# Altium PCB Swarm-Medusa-Antenna.PcbDoc
Units mil, origin at the board's own origin, x right, y up, seen from the top; angles counter-clockwise.
Board outline 3500 x 3500 mil, 2 copper layers (Top Layer, Bottom Layer); 8 components, 6 nets, 16 pads, 1358 vias.
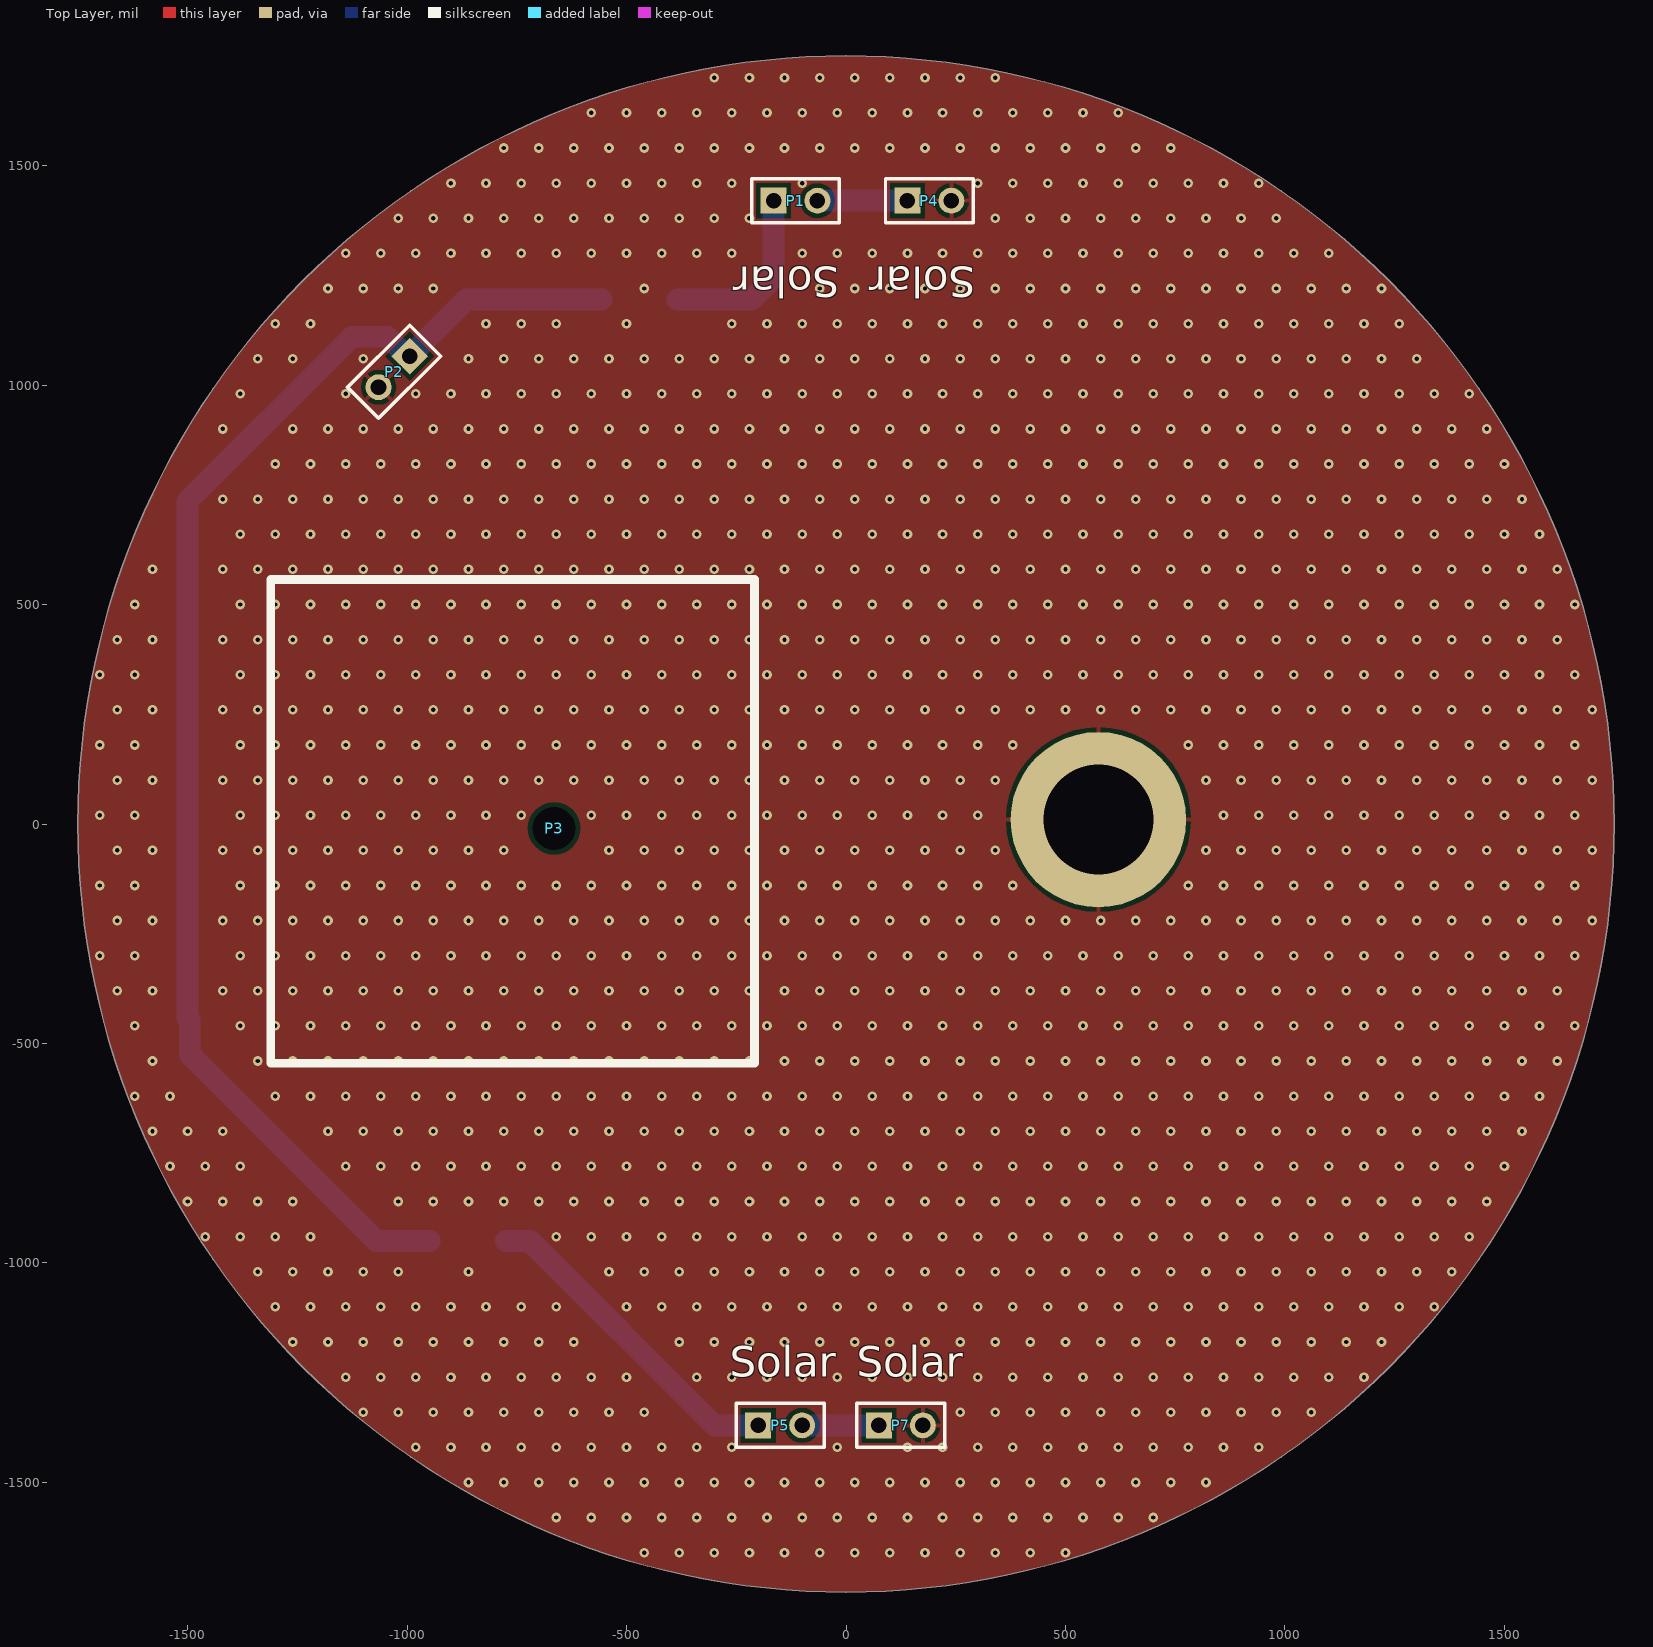
[diagram p0: Top Layer view]
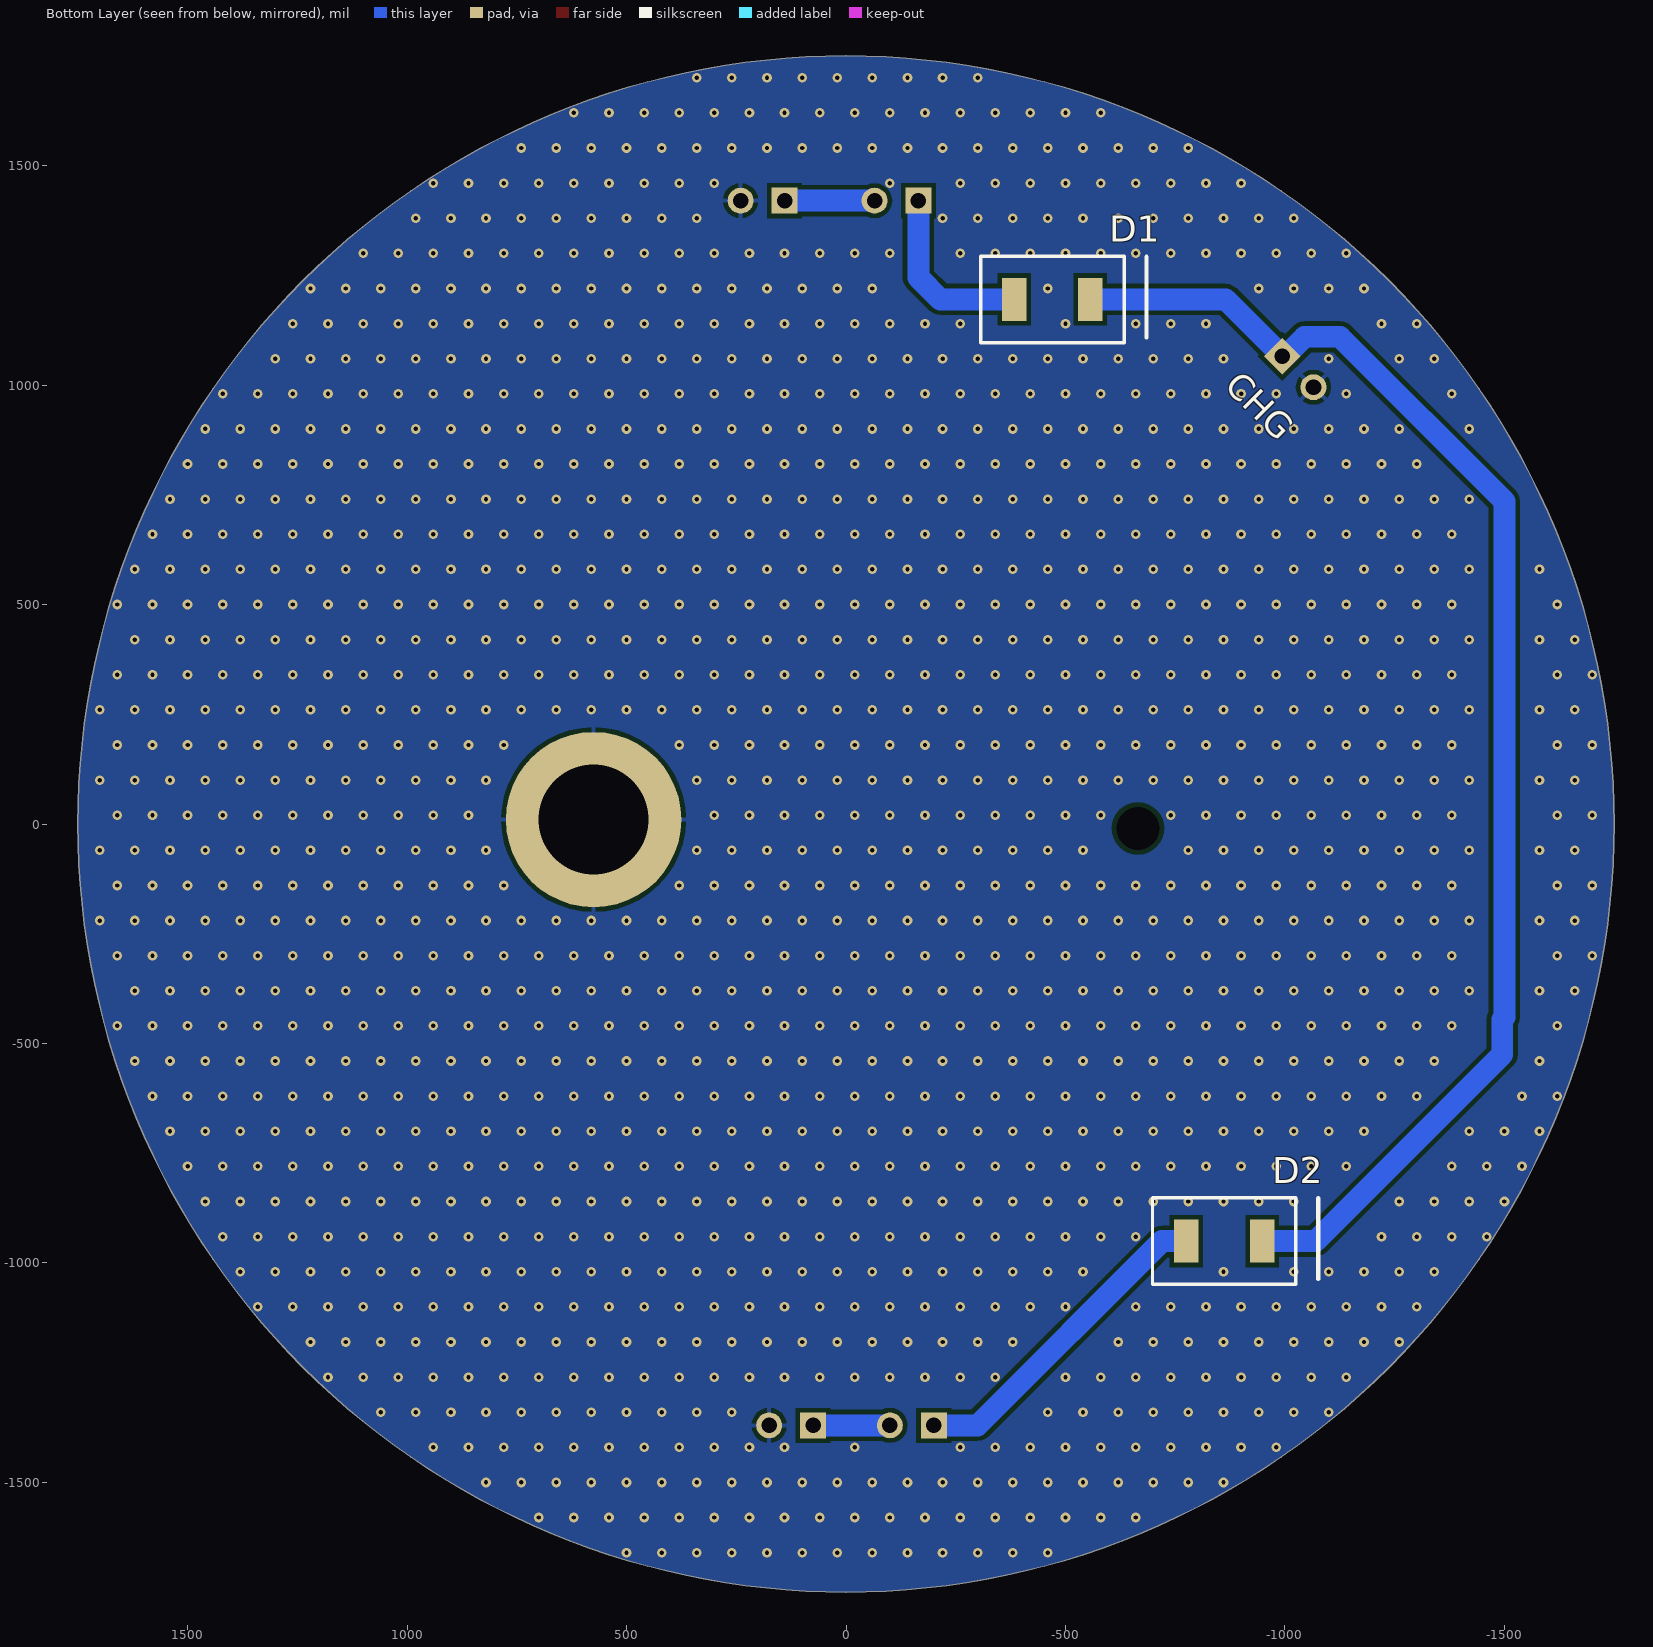
[diagram p1: Bottom Layer view, seen from below]

## Layer stack, top to bottom
Top Solder: solder mask 0.4, Solder Resist, Dk 3.5
Top Layer: signal copper 1.4
Dielectric 1: dielectric 12.6, FR-4, Dk 4.8
Bottom Layer: signal copper 1.4
Bottom Solder: solder mask 0.4, Solder Resist, Dk 3.5

## Board outline
-1750,0 ccw(c0,0) 0,-1750 ccw(c0,0) 1750,0 ccw(c0,0) 0,1750 ccw(c0,0)

## Design rules (kind name [scope] priority, off if disabled: settings)
Clearance [All] p1: gap=10 ignorepadtopadclearanceinfootprint=FALSE except(0: Arc-Hole Track-Hole SMDPad-Hole THPad-Hole Via-Hole Fill-Hole Poly-Hole Region-Hole Text-Hole)
PolygonConnect [All] p1: connectstyle=Relief reliefconductorwidth=10 reliefentries=4 polygonreliefangle="90 Angle" airgapwidth=10
RoutingVias [All] p1: holewidth=28 width=50 viastyle="Through Hole" minholewidth=28 minwidth=50 maxholewidth=28 maxwidth=50
SolderMaskExpansion [All] p1: expansion=4 istentingtop=FALSE
Width [All] p1: maxlimit=50 minlimit=10 preferedwidth=20
30 further rules are at their usual default settings.

## Components (designator, comment, footprint, x,y, rotation, side; value= is the part's Value field where it differs from the comment)
D1 "PMEG3050EP*" Diode_PMEG3050EP -470,1195 r180 bottom
D2 "PMEG3050EP*" Diode_PMEG3050EP -861.61,-950 r180 bottom
P1 "Solar" HDR1X2 -165,1420 r0 top
P2 "Output" HDR1X2 -994.29,1065.71 r225 top
P3 "GPS" "Iridium Antenna" -208.31,-545.43 r180 top
P4 "Solar" HDR1X2 140,1420 r0 top
P5 "Solar" HDR1X2 -200,-1370 r0 top
P7 "Solar" HDR1X2 75,-1370 r0 top

## Footprints (in the part's own frame and the unit in brackets; to place one, negate y for a bottom-side part, rotate by r counter-clockwise, add the part's x,y. Pads: shape width x height; smd on the part's side, far side on the other; paste and mask are expansions set on the pad)
Diode_PMEG3050EP [mm]
  rect 1.4x2.5 smd: A(-2.2,0) K(2.2,0)
  silkscreen extent -4.15,-2.5 5.45,2.5
HDR1X2 [mm] "Connector; Header; 2 Position"
  rect 1.5x1.5 hole 0.9: 1(0,0)
  round 1.5 hole 0.9: 2(2.54,0)
  silkscreen extent -1.27,-1.27 3.81,1.27
"Iridium Antenna" [mm] "Iridium patch antenna"
  round 1.524 hole 2.5: 0(11.6,-13.6)
  silkscreen extent 0,-28 28,0

## Part data
D1 D2: library part Diode_PMEG3050EP
P1 P2 P4 P5 P7: library part "Header 2", "Header, 2-Pin", LatestRevisionDate=17-Jul-2002, LatestRevisionNote="Re-released for DXP Platform.", Publisher="Altium Limited"
P3: library part "Iridium Antenna"

## Free pads (board coordinates)
  round 400 hole 250: 1(575,10)

## Via types
v1: diameter 22, hole 10, Top Layer to Bottom Layer, 1358 vias

## Nets (pads, with @x,y where several pads share a name; then routed paths per layer and width w, separated by ;. In a path a pad name is that pad's centre, name@x,y a point inside that pad or via, vN(x,y) a via of type N, cw(c..) or ccw(c..) an arc to the next point about the centre after c; other vN are vias at no path point)
GND: P2.2 P4.2 P7.2 pad.1
  other v1: -460,-1660 -380,-1660 -300,-1660 -220,-1660 -140,-1660 -60,-1660 20,-1660 100,-1660 180,-1660 260,-1660 340,-1660 420,-1660 500,-1660 -660,-1580 -580,-1580 -500,-1580 -420,-1580 -340,-1580 -260,-1580 -180,-1580 -100,-1580 -20,-1580 60,-1580 140,-1580 220,-1580 300,-1580 380,-1580 460,-1580 540,-1580 620,-1580 700,-1580 -860,-1500 -780,-1500 -700,-1500 -620,-1500 -540,-1500 -460,-1500 -380,-1500 -300,-1500 -220,-1500 -140,-1500 -60,-1500 20,-1500 100,-1500 180,-1500 260,-1500 340,-1500 420,-1500 500,-1500 580,-1500 660,-1500 740,-1500 820,-1500 -980,-1420 -900,-1420 -820,-1420 -740,-1420 -660,-1420 -580,-1420 -500,-1420 -420,-1420 -340,-1420 -260,-1420 -20,-1420 140,-1420 220,-1420 300,-1420 380,-1420 460,-1420 540,-1420 620,-1420 700,-1420 780,-1420 860,-1420 940,-1420 -1100,-1340 -1020,-1340 -940,-1340 -860,-1340 -780,-1340 -700,-1340 -620,-1340 -540,-1340 -460,-1340 260,-1340 340,-1340 420,-1340 500,-1340 580,-1340 660,-1340 740,-1340 820,-1340 900,-1340 980,-1340 1060,-1340 -1140,-1260 -1060,-1260 -980,-1260 -900,-1260 -820,-1260 -740,-1260 -660,-1260 -580,-1260 -500,-1260 -340,-1260 -260,-1260 -180,-1260 -100,-1260 -20,-1260 60,-1260 140,-1260 220,-1260 300,-1260 380,-1260 460,-1260 540,-1260 620,-1260 700,-1260 780,-1260 860,-1260 940,-1260 1020,-1260 1100,-1260 1180,-1260 -1260,-1180 -1180,-1180 -1100,-1180 -1020,-1180 -940,-1180 -860,-1180 -780,-1180 -700,-1180 -620,-1180 -380,-1180 -300,-1180 -220,-1180 -140,-1180 -60,-1180 20,-1180 100,-1180 180,-1180 260,-1180 340,-1180 420,-1180 500,-1180 580,-1180 660,-1180 740,-1180 820,-1180 900,-1180 980,-1180 1060,-1180 1140,-1180 1220,-1180 -1300,-1100 -1220,-1100 -1140,-1100 -1060,-1100 -980,-1100 -900,-1100 -820,-1100 -740,-1100 -660,-1100 -500,-1100 -420,-1100 -340,-1100 -260,-1100 -180,-1100 -100,-1100 -20,-1100 60,-1100 140,-1100 220,-1100 300,-1100 380,-1100 460,-1100 540,-1100 620,-1100 700,-1100 780,-1100 860,-1100 940,-1100 1020,-1100 1100,-1100 1180,-1100 1260,-1100 1340,-1100 -1340,-1020 -1260,-1020 -1180,-1020 -1100,-1020 -1020,-1020 -860,-1020 -540,-1020 -460,-1020 -380,-1020 -300,-1020 -220,-1020 -140,-1020 -60,-1020 20,-1020 100,-1020 180,-1020 260,-1020 340,-1020 420,-1020 500,-1020 580,-1020 660,-1020 740,-1020 820,-1020 900,-1020 980,-1020 1060,-1020 1140,-1020 1220,-1020 1300,-1020 1380,-1020 -1460,-940 -1380,-940 -1300,-940 -1220,-940 -660,-940 -580,-940 -500,-940 -420,-940 -340,-940 -260,-940 -180,-940 -100,-940 -20,-940 60,-940 140,-940 220,-940 300,-940 380,-940 460,-940 540,-940 620,-940 700,-940 780,-940 860,-940 940,-940 1020,-940 1100,-940 1180,-940 1260,-940 1340,-940 1420,-940 -1500,-860 -1420,-860 -1340,-860 -1260,-860 -1020,-860 -940,-860 -860,-860 -780,-860 -700,-860 -620,-860 -540,-860 -460,-860 -380,-860 -300,-860 -220,-860 -140,-860 -60,-860 20,-860 100,-860 180,-860 260,-860 340,-860 420,-860 500,-860 580,-860 660,-860 740,-860 820,-860 900,-860 980,-860 1060,-860 1140,-860 1220,-860 1300,-860 1380,-860 1460,-860 -1540,-780 -1460,-780 -1380,-780 -1140,-780 -1060,-780 -980,-780 -900,-780 -820,-780 -740,-780 -660,-780 -580,-780 -500,-780 -420,-780 -340,-780 -260,-780 -180,-780 -100,-780 -20,-780 60,-780 140,-780 220,-780 300,-780 380,-780 460,-780 540,-780 620,-780 700,-780 780,-780 860,-780 940,-780 1020,-780 1100,-780 1180,-780 1260,-780 1340,-780 1420,-780 1500,-780 -1580,-700 -1500,-700 -1420,-700 -1180,-700 -1100,-700 -1020,-700 -940,-700 -860,-700 -780,-700 -700,-700 -620,-700 -540,-700 -460,-700 -380,-700 -300,-700 -220,-700 -140,-700 -60,-700 20,-700 100,-700 180,-700 260,-700 340,-700 420,-700 500,-700 580,-700 660,-700 740,-700 820,-700 900,-700 980,-700 1060,-700 1140,-700 1220,-700 1300,-700 1380,-700 1460,-700 1540,-700 -1620,-620 -1540,-620 -1300,-620 -1220,-620 -1140,-620 -1060,-620 -980,-620 -900,-620 -820,-620 -740,-620 -660,-620 -580,-620 -500,-620 -420,-620 -340,-620 -260,-620 -180,-620 -100,-620 -20,-620 60,-620 140,-620 220,-620 300,-620 380,-620 460,-620 540,-620 620,-620 700,-620 780,-620 860,-620 940,-620 1020,-620 1100,-620 1180,-620 1260,-620 1340,-620 1420,-620 1500,-620 1580,-620 -1580,-540 -1340,-540 -1260,-540 -1180,-540 -1100,-540 -1020,-540 -940,-540 -860,-540 -780,-540 -700,-540 -620,-540 -540,-540 -460,-540 -380,-540 -300,-540 -220,-540 -140,-540 -60,-540 20,-540 100,-540 180,-540 260,-540 340,-540 420,-540 500,-540 580,-540 660,-540 740,-540 820,-540 900,-540 980,-540 1060,-540 1140,-540 1220,-540 1300,-540 1380,-540 1460,-540 1540,-540 1620,-540 -1620,-460 -1380,-460 -1300,-460 -1220,-460 -1140,-460 -1060,-460 -980,-460 -900,-460 -820,-460 -740,-460 -660,-460 -580,-460 -500,-460 -420,-460 -340,-460 -260,-460 -180,-460 -100,-460 -20,-460 60,-460 140,-460 220,-460 300,-460 380,-460 460,-460 540,-460 620,-460 700,-460 780,-460 860,-460 940,-460 1020,-460 1100,-460 1180,-460 1260,-460 1340,-460 1420,-460 1500,-460 1580,-460 1660,-460 -1660,-380 -1580,-380 -1420,-380 -1340,-380 -1260,-380 -1180,-380 -1100,-380 -1020,-380 -940,-380 -860,-380 -780,-380 -700,-380 -620,-380 -540,-380 -460,-380 -380,-380 -300,-380 -220,-380 -140,-380 -60,-380 20,-380 100,-380 180,-380 260,-380 340,-380 420,-380 500,-380 580,-380 660,-380 740,-380 820,-380 900,-380 980,-380 1060,-380 1140,-380 1220,-380 1300,-380 1380,-380 1460,-380 1540,-380 1620,-380 -1700,-300 -1620,-300 -1380,-300 -1300,-300 -1220,-300 -1140,-300 -1060,-300 -980,-300 -900,-300 -820,-300 -740,-300 -660,-300 -580,-300 -500,-300 -420,-300 -340,-300 -260,-300 -180,-300 -100,-300 -20,-300 60,-300 140,-300 220,-300 300,-300 380,-300 460,-300 540,-300 620,-300 700,-300 780,-300 860,-300 940,-300 1020,-300 1100,-300 1180,-300 1260,-300 1340,-300 1420,-300 1500,-300 1580,-300 1660,-300 -1660,-220 -1580,-220 -1420,-220 -1340,-220 -1260,-220 -1180,-220 -1100,-220 -1020,-220 -940,-220 -860,-220 -780,-220 -700,-220 -620,-220 -540,-220 -460,-220 -380,-220 -300,-220 -220,-220 -140,-220 -60,-220 20,-220 100,-220 180,-220 260,-220 340,-220 420,-220 500,-220 580,-220 660,-220 740,-220 820,-220 900,-220 980,-220 1060,-220 1140,-220 1220,-220 1300,-220 1380,-220 1460,-220 1540,-220 1620,-220 1700,-220 -1700,-140 -1620,-140 -1380,-140 -1300,-140 -1220,-140 -1140,-140 -1060,-140 -980,-140 -900,-140 -820,-140 -740,-140 -660,-140 -580,-140 -500,-140 -420,-140 -340,-140 -260,-140 -180,-140 -100,-140 -20,-140 60,-140 140,-140 220,-140 300,-140 380,-140 780,-140 860,-140 940,-140 1020,-140 1100,-140 1180,-140 1260,-140 1340,-140 1420,-140 1500,-140 1580,-140 1660,-140 -1660,-60 -1580,-60 -1420,-60 -1340,-60 -1260,-60 -1180,-60 -1100,-60 -1020,-60 -940,-60 -860,-60 -780,-60 -540,-60 -460,-60 -380,-60 -300,-60 -220,-60 -140,-60 -60,-60 20,-60 100,-60 180,-60 260,-60 340,-60 820,-60 900,-60 980,-60 1060,-60 1140,-60 1220,-60 1300,-60 1380,-60 1460,-60 1540,-60 1620,-60 1700,-60 -1700,20 -1620,20 -1380,20 -1300,20 -1220,20 -1140,20 -1060,20 -980,20 -900,20 -820,20 -740,20 -580,20 -500,20 -420,20 -340,20 -260,20 -180,20 -100,20 -20,20 60,20 140,20 220,20 300,20 860,20 940,20 1020,20 1100,20 1180,20 1260,20 1340,20 1420,20 1500,20 1580,20 1660,20 -1660,100 -1580,100 -1420,100 -1340,100 -1260,100 -1180,100 -1100,100 -1020,100 -940,100 -860,100 -780,100 -700,100 -620,100 -540,100 -460,100 -380,100 -300,100 -220,100 -140,100 -60,100 20,100 100,100 180,100 260,100 340,100 820,100 900,100 980,100 1060,100 1140,100 1220,100 1300,100 1380,100 1460,100 1540,100 1620,100 1700,100 -1700,180 -1620,180 -1380,180 -1300,180 -1220,180 -1140,180 -1060,180 -980,180 -900,180 -820,180 -740,180 -660,180 -580,180 -500,180 -420,180 -340,180 -260,180 -180,180 -100,180 -20,180 60,180 140,180 220,180 300,180 380,180 780,180 860,180 940,180 1020,180 1100,180 1180,180 1260,180 1340,180 1420,180 1500,180 1580,180 1660,180 -1660,260 -1580,260 -1420,260 -1340,260 -1260,260 -1180,260 -1100,260 -1020,260 -940,260 -860,260 -780,260 -700,260 -620,260 -540,260 -460,260 -380,260 -300,260 -220,260 -140,260 -60,260 20,260 100,260 180,260 260,260 340,260 420,260 500,260 580,260 660,260 740,260 820,260 900,260 980,260 1060,260 1140,260 1220,260 1300,260 1380,260 1460,260 1540,260 1620,260 1700,260 -1700,340 -1620,340 -1380,340 -1300,340 -1220,340 -1140,340 -1060,340 -980,340 -900,340 -820,340 -740,340 -660,340 -580,340 -500,340 -420,340 -340,340 -260,340 -180,340 -100,340 -20,340 60,340 140,340 220,340 300,340 380,340 460,340 540,340 620,340 700,340 780,340 860,340 940,340 1020,340 1100,340 1180,340 1260,340 1340,340 1420,340 1500,340 1580,340 1660,340 -1660,420 -1580,420 -1420,420 -1340,420 -1260,420 -1180,420 -1100,420 -1020,420 -940,420 -860,420 -780,420 -700,420 -620,420 -540,420 -460,420 -380,420 -300,420 -220,420 -140,420 -60,420 20,420 100,420 180,420 260,420 340,420 420,420 500,420 580,420 660,420 740,420 820,420 900,420 980,420 1060,420 1140,420 1220,420 1300,420 1380,420 1460,420 1540,420 1620,420 -1620,500 -1380,500 -1300,500 -1220,500 -1140,500 -1060,500 -980,500 -900,500 -820,500 -740,500 -660,500 -580,500 -500,500 -420,500 -340,500 -260,500 -180,500 -100,500 -20,500 60,500 140,500 220,500 300,500 380,500 460,500 540,500 620,500 700,500 780,500 860,500 940,500 1020,500 1100,500 1180,500 1260,500 1340,500 1420,500 1500,500 1580,500 1660,500 -1580,580 -1420,580 -1340,580 -1260,580 -1180,580 -1100,580 -1020,580 -940,580 -860,580 -780,580 -700,580 -620,580 -540,580 -460,580 -380,580 -300,580 -220,580 -140,580 -60,580 20,580 100,580 180,580 260,580 340,580 420,580 500,580 580,580 660,580 740,580 820,580 900,580 980,580 1060,580 1140,580 1220,580 1300,580 1380,580 1460,580 1540,580 1620,580 -1380,660 -1300,660 -1220,660 -1140,660 -1060,660 -980,660 -900,660 -820,660 -740,660 -660,660 -580,660 -500,660 -420,660 -340,660 -260,660 -180,660 -100,660 -20,660 60,660 140,660 220,660 300,660 380,660 460,660 540,660 620,660 700,660 780,660 860,660 940,660 1020,660 1100,660 1180,660 1260,660 1340,660 1420,660 1500,660 1580,660 -1420,740 -1340,740 -1260,740 -1180,740 -1100,740 -1020,740 -940,740 -860,740 -780,740 -700,740 -620,740 -540,740 -460,740 -380,740 -300,740 -220,740 -140,740 -60,740 20,740 100,740 180,740 260,740 340,740 420,740 500,740 580,740 660,740 740,740 820,740 900,740 980,740 1060,740 1140,740 1220,740 1300,740 1380,740 1460,740 1540,740 -1300,820 -1220,820 -1140,820 -1060,820 -980,820 -900,820 -820,820 -740,820 -660,820 -580,820 -500,820 -420,820 -340,820 -260,820 -180,820 -100,820 -20,820 60,820 140,820 220,820 300,820 380,820 460,820 540,820 620,820 700,820 780,820 860,820 940,820 1020,820 1100,820 1180,820 1260,820 1340,820 1420,820 1500,820 -1420,900 -1260,900 -1180,900 -1100,900 -1020,900 -940,900 -860,900 -780,900 -700,900 -620,900 -540,900 -460,900 -380,900 -300,900 -220,900 -140,900 -60,900 20,900 100,900 180,900 260,900 340,900 420,900 500,900 580,900 660,900 740,900 820,900 900,900 980,900 1060,900 1140,900 1220,900 1300,900 1380,900 1460,900 -1380,980 -1140,980 -980,980 -900,980 -820,980 -740,980 -660,980 -580,980 -500,980 -420,980 -340,980 -260,980 -180,980 -100,980 -20,980 60,980 140,980 220,980 300,980 380,980 460,980 540,980 620,980 700,980 780,980 860,980 940,980 1020,980 1100,980 1180,980 1260,980 1340,980 1420,980 -1340,1060 -1260,1060 -1100,1060 -860,1060 -780,1060 -700,1060 -620,1060 -540,1060 -460,1060 -380,1060 -300,1060 -220,1060 -140,1060 -60,1060 20,1060 100,1060 180,1060 260,1060 340,1060 420,1060 500,1060 580,1060 660,1060 740,1060 820,1060 900,1060 980,1060 1060,1060 1140,1060 1220,1060 1300,1060 -1300,1140 -1220,1140 -820,1140 -740,1140 -660,1140 -500,1140 -260,1140 -180,1140 -100,1140 -20,1140 60,1140 140,1140 220,1140 300,1140 380,1140 460,1140 540,1140 620,1140 700,1140 780,1140 860,1140 940,1140 1020,1140 1100,1140 1180,1140 1260,1140 -1180,1220 -1100,1220 -1020,1220 -940,1220 -460,1220 -60,1220 20,1220 100,1220 180,1220 260,1220 340,1220 420,1220 500,1220 580,1220 660,1220 740,1220 820,1220 900,1220 980,1220 1060,1220 1140,1220 1220,1220 -1140,1300 -1060,1300 -980,1300 -900,1300 -820,1300 -740,1300 -660,1300 -580,1300 -500,1300 -420,1300 -340,1300 -260,1300 -100,1300 -20,1300 60,1300 140,1300 220,1300 300,1300 380,1300 460,1300 540,1300 620,1300 700,1300 780,1300 860,1300 940,1300 1020,1300 1100,1300 -1020,1380 -940,1380 -860,1380 -780,1380 -700,1380 -620,1380 -540,1380 -460,1380 -380,1380 -300,1380 -220,1380 340,1380 420,1380 500,1380 580,1380 660,1380 740,1380 820,1380 900,1380 980,1380 -900,1460 -820,1460 -740,1460 -660,1460 -580,1460 -500,1460 -420,1460 -340,1460 -260,1460 -100,1460 300,1460 380,1460 460,1460 540,1460 620,1460 700,1460 780,1460 860,1460 940,1460 -780,1540 -700,1540 -620,1540 -540,1540 -460,1540 -380,1540 -300,1540 -220,1540 -140,1540 -60,1540 20,1540 100,1540 180,1540 260,1540 340,1540 420,1540 500,1540 580,1540 660,1540 740,1540 -580,1620 -500,1620 -420,1620 -340,1620 -260,1620 -180,1620 -100,1620 -20,1620 60,1620 140,1620 220,1620 300,1620 380,1620 460,1620 540,1620 620,1620 -300,1700 -220,1700 -140,1700 -60,1700 20,1700 100,1700 180,1700 260,1700 340,1700
NetD1_A: D1.A P1.1 | length 414.1
  Bottom Layer w50: D1.A -215,1195 -165,1245 P1.1
NetD2_A: D2.A P5.1 | length 749
  Bottom Layer w50: D2.A -720,-950 -300,-1370 P5.1
NetP1_2: P1.2 P4.1 | length 205
  Bottom Layer w50: P1.2 P4.1
NetP5_2: P5.2 P7.1 | length 175
  Bottom Layer w50: P5.2 P7.1
V_SOLAR: D1.K D2.K P2.1 | length 3149.1
  Bottom Layer w50: P2.1@-1000.69,1065.71 -1044.98,1110 -1125,1110 -1500,735 -1500,-440 -1495,-445 -1495,-525 -1070,-950 D2.K ; P2.1 -865,1195 D1.K
pads on no net: P3.0

## Polygon pours and split planes (outlines as drawn)
GND on Top Layer "GND_L01_P000" (solid, pour order 0): -1750,0 ccw(c0,0) 0,-1750 ccw(c0,0) 1750,0 ccw(c0,0) 0,1750 ccw(c0,0)
GND on Bottom Layer "GND_L02_P001" (solid, pour order 1): -1750,0 ccw(c0,0) 0,-1750 ccw(c0,0) 1750,0 ccw(c0,0) 0,1750 ccw(c0,0)

## Silkscreen, mask and mechanical layers (free items; w line width, h text height)
Top Overlay:
  text "Solar" at -15,1293.67 h120 r180
  text "Solar" at 295,1293.67 h120 r180
  text "Solar" at -265,-1283.67 h120
  text "Solar" at 25,-1283.67 h120
Bottom Overlay:
  text "CHG" at -845.78,980.78 h100 r45
Mechanical 1:
  circle w10: c0,0 r1750